# Altium PCB PCB1_backup.PcbDoc
Units mil, origin at the board's own origin, x right, y up, seen from the top; angles counter-clockwise.
Board outline 2660 x 2700 mil, 2 copper layers (Top Layer, Bottom Layer); 54 components, 42 nets, 229 pads, 33 vias.
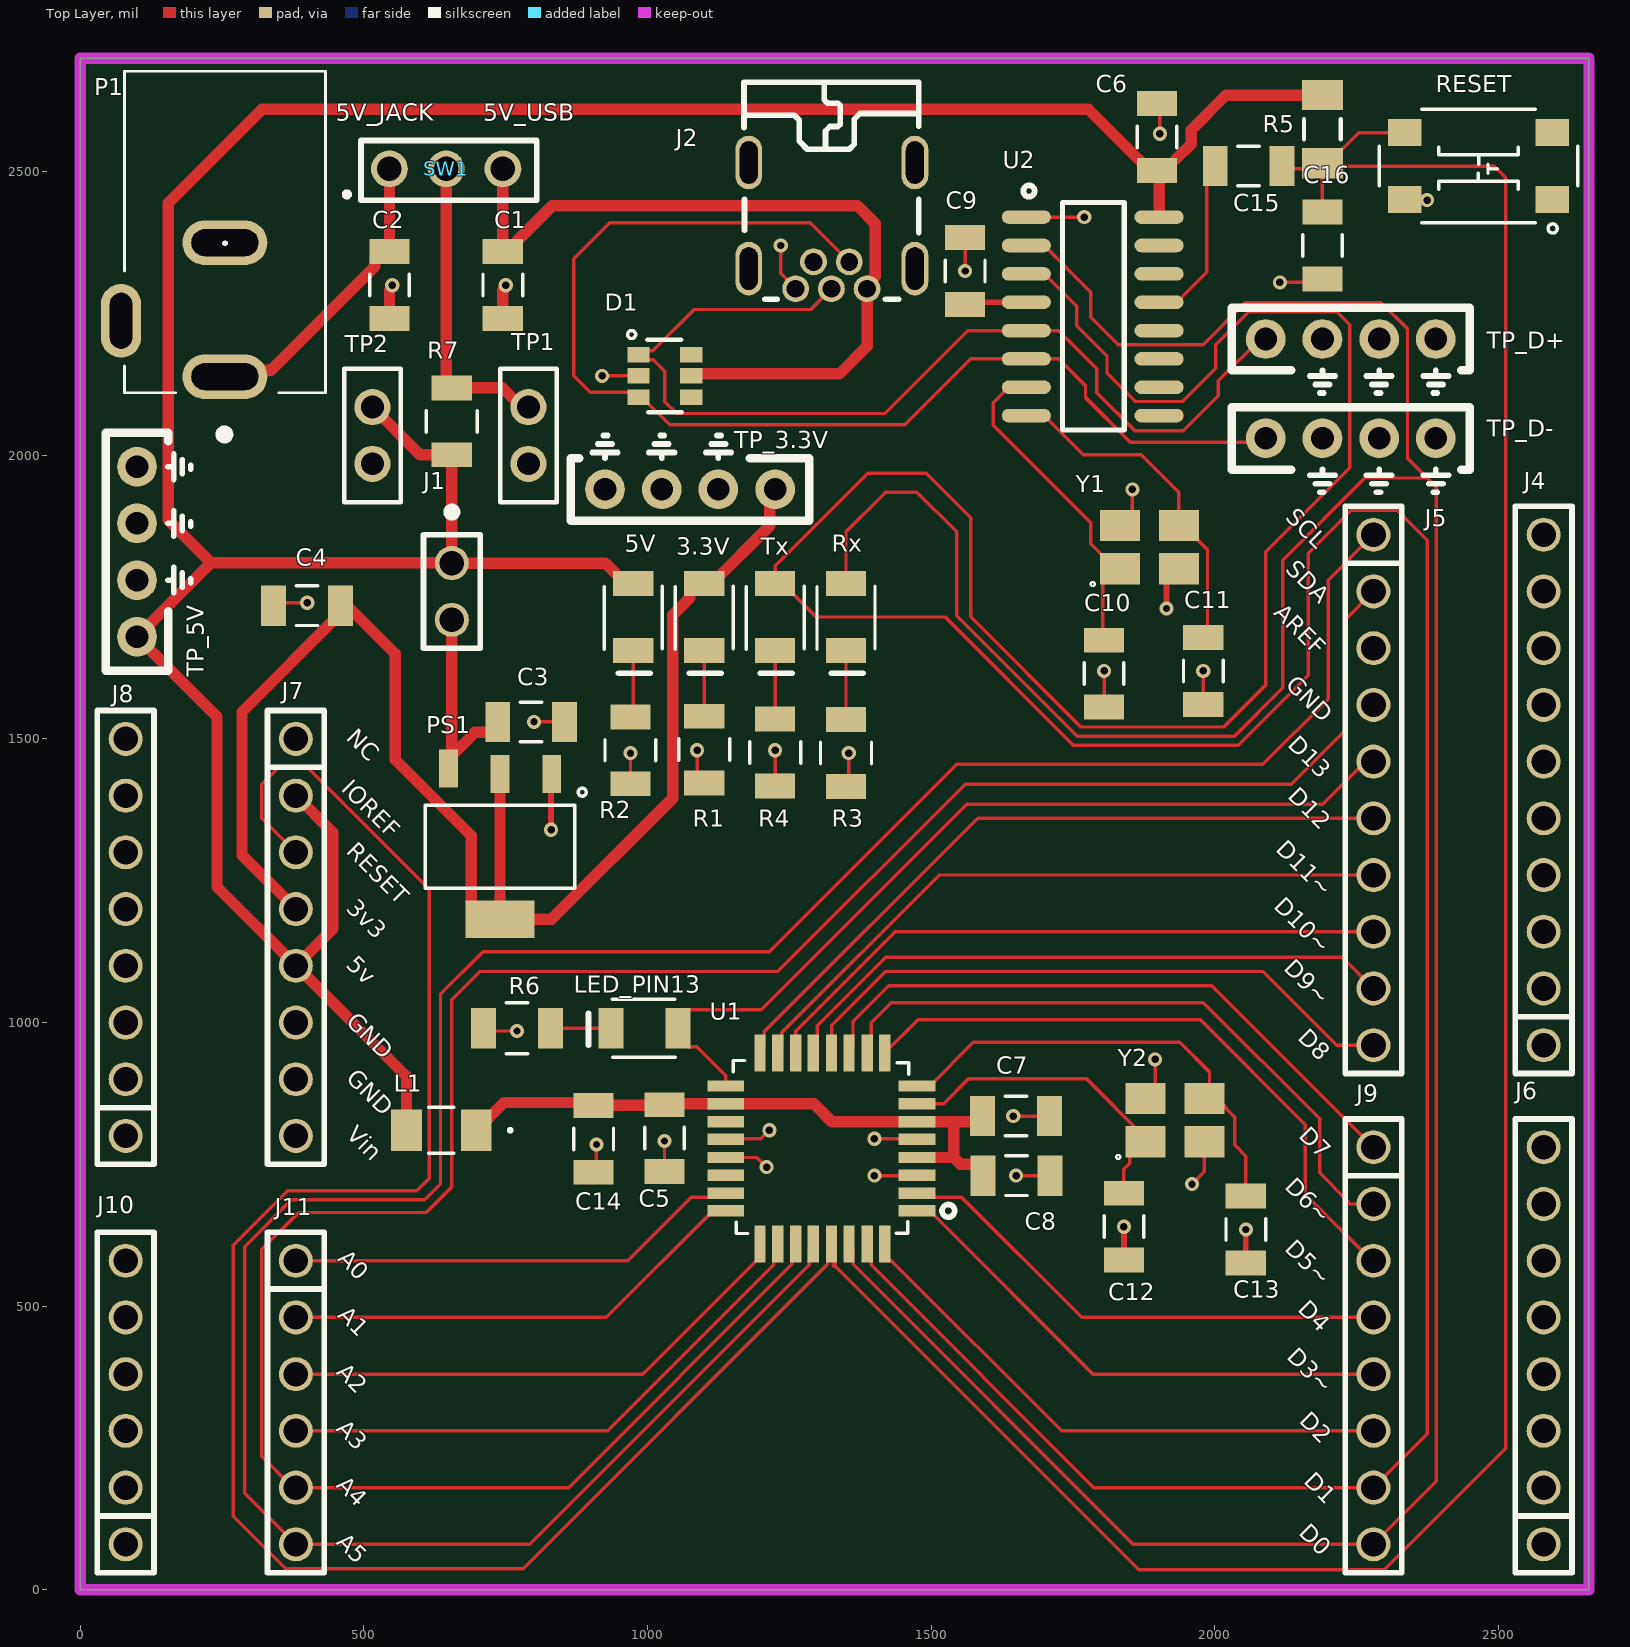
[diagram p0: Top Layer view]
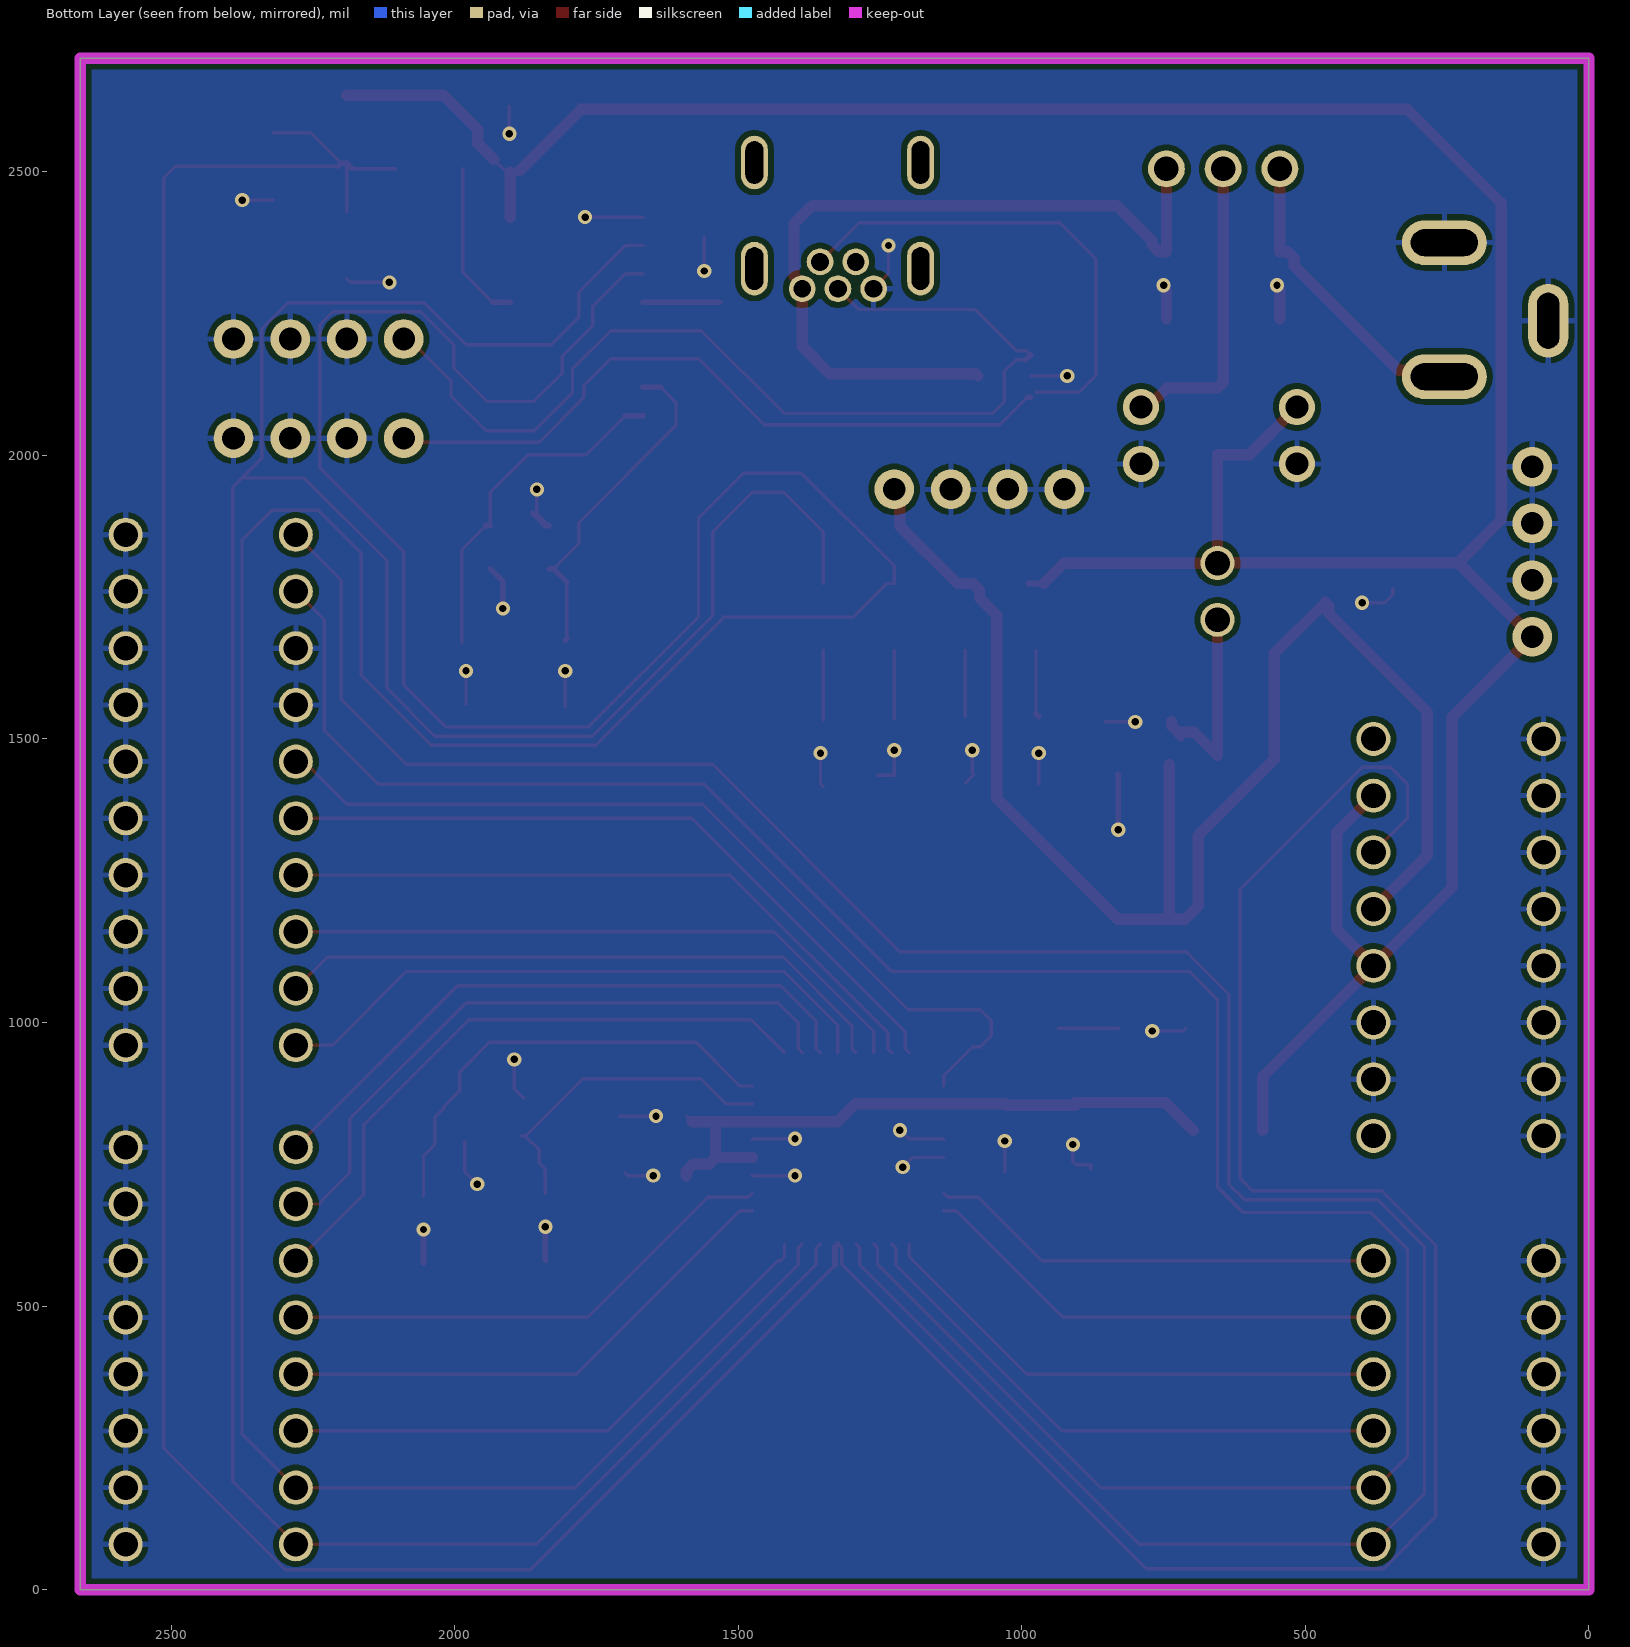
[diagram p1: Bottom Layer view, seen from below]
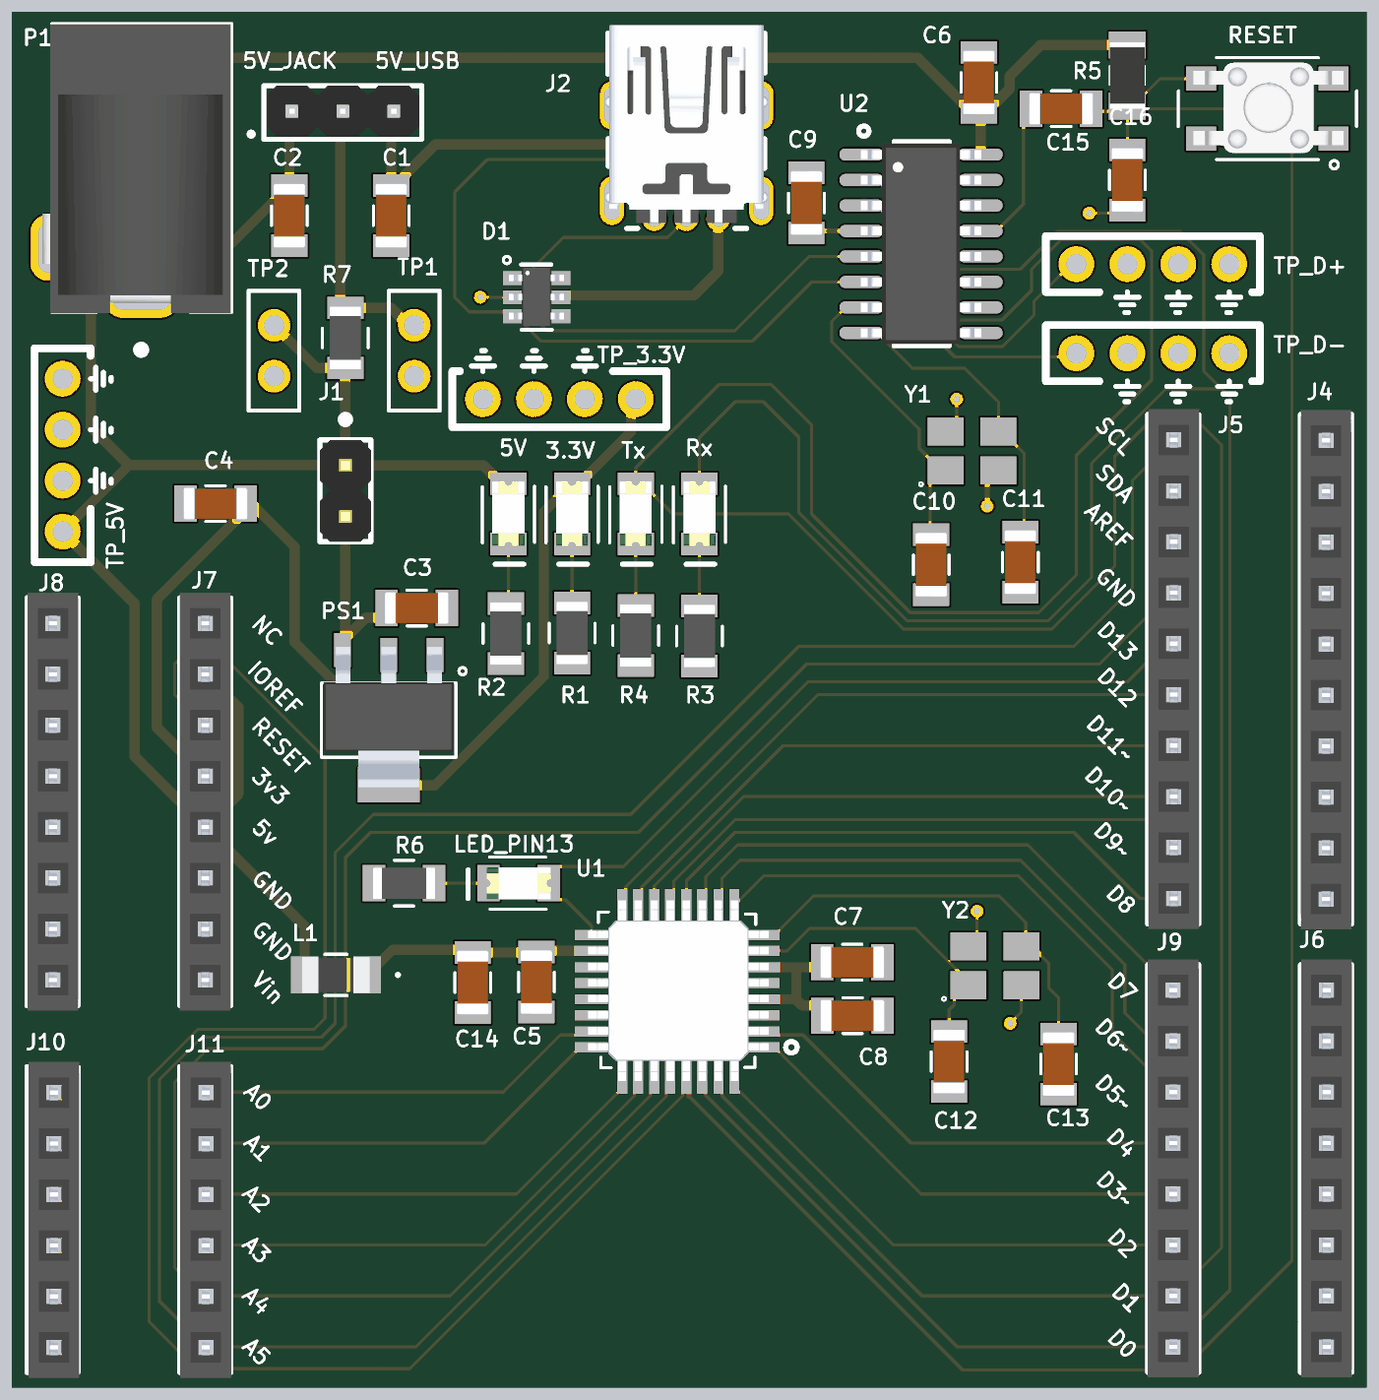
[diagram p2: 3D render of the assembled board from above, using the file's embedded part models]

## Layer stack, top to bottom
Top Solder: solder mask 0.4, Solder Resist, Dk 3.5
Top Layer: signal copper 1.4
Dielectric 1: dielectric 12.6, FR-4, Dk 4.8
Bottom Layer: signal copper 1.4
Bottom Solder: solder mask 0.4, Solder Resist, Dk 3.5

## Board outline
2660,0 2660,2700 0,2700 0,0

## Design rules (kind name [scope] priority, off if disabled: settings)
Clearance [All] p1: gap=10 ignorepadtopadclearanceinfootprint=FALSE
PlaneClearance [All] p1: clearance=10
PlaneConnect [All] p1: planeconnectstyle=Direct reliefexpansion=20 reliefentries=4 reliefconductorwidth=10 reliefairgap=10
PolygonConnect [All] p1: thpad.connectstyle=Relief thpad.reliefconductorwidth=10 thpad.reliefentries=4 thpad.polygonreliefangle="90 Angle" thpad.airgapwidth=10 smdpad.connectstyle=Direct smdpad.reliefconductorwidth=10 smdpad.reliefentries=4 smdpad.polygonreliefangle="90 Angle" smdpad.airgapwidth=10 via.connectstyle=Direct via.reliefconductorwidth=10 via.reliefentries=4 via.polygonreliefangle="90 Angle" via.airgapwidth=10
RoutingVias [All] p1: holewidth=13 width=25 viastyle="Through Hole" minholewidth=13 minwidth=25 maxholewidth=60 maxwidth=80
SolderMaskExpansion [All] p1: expansion=4 istentingtop=FALSE
Width "Schematic Width Constraint_4" [InNet('+5')] p1: maxlimit=30 minlimit=20 preferedwidth=20 minimp=50.000000 maximp=50.000000 favimp=50.000000
Width "Schematic Width Constraint_3" [InNet('5V_USB')] p2: maxlimit=30 minlimit=20 preferedwidth=20 minimp=50.000000 maximp=50.000000 favimp=50.000000
Width "Schematic Width Constraint_2" [InNet('3.3V')] p3: maxlimit=30 minlimit=20 preferedwidth=20 minimp=50.000000 maximp=50.000000 favimp=50.000000
Width "Schematic Width Constraint_1" [InNet('5V_JACK')] p4: maxlimit=30 minlimit=20 preferedwidth=20 minimp=50.000000 maximp=50.000000 favimp=50.000000
Width "Schematic Width Constraint" [InNet('NetR7_2')] p5: maxlimit=30 minlimit=20 preferedwidth=20 minimp=50.000000 maximp=50.000000 favimp=50.000000
Width [All] p6: maxlimit=10 minlimit=6 preferedwidth=6 minimp=50.000000 maximp=50.000000 favimp=50.000000
28 further rules are at their usual default settings.

## Classes and differential pairs
component class Sheet2: J4 J5 J6 J7 J8 J9 J10 J11
component class Sheet1: 3.3V 5V C1 C2 C3 C4 C5 C6 C7 C8 C9 C10 C11 C12 C13 C14 C15 C16 D1 J1 J2 L1 LED_PIN13 P1 PS1 R1 R2 R3 R4 R5 R6 R7 RESET Rx SW1 TP1 TP2 TP_3.3V TP_5V TP_D+ TP_D- Tx U1 U2 Y1 Y2

## Components (designator, comment, footprint, x,y, rotation, side; value= is the part's Value field where it differs from the comment)
3.3V "LED_RED_1206" LED_1206 1100,1715 r270 top value=Red (schematic designator LED1)
5V "LED_RED_1206" LED_1206 975,1715 r270 top value=Red (schematic designator LED2)
C1 "C_22uF_1206" 1206_Passive_Capacitor 745,2300 r90 top value=22µF
C2 "C_22uF_1206" 1206_Passive_Capacitor 545,2300 r90 top value=22µF
C3 "C_22uF_1206" 1206_Passive_Capacitor 795,1530 r0 top value=22µF
C4 "C_22uF_1206" 1206_Passive_Capacitor 400,1735 r180 top value=22µF
C5 "C_22uF_1206" 1206_Passive_Capacitor 1030,796 r90 top value=22µF
C6 "C_22uF_1206" 1206_Passive_Capacitor 1898.5,2561.5 r90 top value=22µF
C7 "C_22uF_1206" 1206_Passive_Capacitor 1650,835 r180 top value=22µF
C8 "C_22uF_1206" 1206_Passive_Capacitor 1650.5,730 r180 top value=22µF
C9 "C_22uF_1206" 1206_Passive_Capacitor 1560,2325 r90 top value=22µF
C10 "C_22uF_1206" 1206_Passive_Capacitor 1805,1615 r90 top value=22pF
C11 "C_22uF_1206" 1206_Passive_Capacitor 1980,1620 r90 top value=22pF
C12 "C_22uF_1206" 1206_Passive_Capacitor 1840,640 r90 top value=22pF
C13 "C_22uF_1206" 1206_Passive_Capacitor 2055,635 r90 top value=22pF
C14 "C_22uF_1206" 1206_Passive_Capacitor 905,795 r90 top value=22µF
C15 "1uF" 1206_Passive_Capacitor 2060,2510 r0 top
C16 "C_1uF_1206" 1206_Passive_Capacitor 2190,2370 r90 top value=1µF
D1 "D_TVS_Diode" TVS 1030,2140 r0 top value="TVS DIODE 5.5V 6TSOP"
J1 "JM_2_PIN_MALE" 2_PIN_100MIL 655,1760 r270 top value="2 PIN"
J2 "J_USB_B_Mini" USB_MINI_B 1325,2405 r180 top value="USB mini B"
J4 "JF_10_PIN_FEMALE_" "10_PIN_100MIL - Female" 2580,960 r90 top value=Female
J5 "JF_10_PIN_FEMA_ARDUINO" 10_PIN_ARDUINO_100MIL 2280,1860 r270 top value=Female
J6 "JF_8_PIN_FEMALE" "8_PIN_100MIL - Female" 2580,80 r90 top value=Female
J7 "JF_8_PIN_FEMA_ARD-Pwr" 8_PIN_ARD-PWR_100MIL 380,1500 r270 top value=Female
J8 "JF_8_PIN_FEMALE" "8_PIN_100MIL - Female" 80,800 r90 top value=Female
J9 "JF_8_PIN_FEMA_ARD-Dig" 8_PIN_ARD-DIG_100MIL 2280,780 r270 top value=Female
J10 "JF_6_PIN_FEMALE" "6_PIN_100MIL -Female" 80,80 r90 top value=Female
J11 "JF_6_PIN_FEMA_ARD-Anolog" 6_PIN_ARD-Analog_100mil 380,580 r270 top value=Female
L1 "FB_10uH_1206" AIML-1206_ABR-M 636.5,810 r180 top
LED_PIN13 "LED_RED_1206" LED_1206 995,990 r180 top value=Red (schematic designator LED5)
P1 "P_Power Jack" Power_Jack 255,2138.78 r90 top value="CONN PWR JACK 2X5.5MM SOLDER"
PS1 "PS_AMS_LDO_3v3" LDO 740,1310 r180 top value="IC REG LINEAR 3.3V 800MA SOT223"
R1 "R_1K_1206" 1206_Passive_Resitor 1100,1481 r90 top value=1k
R2 "R_1K_1206" 1206_Passive_Resitor 970,1480 r90 top value=1k
R3 "R_1K_1206" 1206_Passive_Resitor 1350,1475 r90 top value=1k
R4 "R_1K_1206" 1206_Passive_Resitor 1225,1476 r90 top value=1k
R5 "Resistor 10k +/-1% 1206 250 mW" RESC3216X60X45ML15T20 2190,2575 r90 top value=10k
R6 "R_1K_1206" 1206_Passive_Resitor 770,990 r0 top value=1k
R7 "R_500mOhm_1206" 1206_Passive_Resitor 655,2060 r90 top value=0.5
RESET "SW_Push_Button_JLC" Switch_JLC 2465,2510 r180 top (schematic designator SW2)
Rx "LED_RED_1206" LED_1206 1350,1715 r270 top value=Red (schematic designator LED3)
SW1 "SW_3Pin_100mil_Switch" 3_PIN_100mil 545,2505 r0 top value="CONN HEADER VERT 3POS 2.54MM"
TP1 "TP_Curr+" TP_Diff_Probe 790,1985 r90 top
TP2 "TP_Curr-" TP_Diff_Probe 515,2085 r270 top
TP_3.3V "TP_10x_Probe" TP10x_Probe 1075,1940 r180 top
TP_5V "TP_10x_Probe" TP10x_Probe 100,1830 r90 top
TP_D+ "TP_D+" TP10x_Probe 2240,2205 r0 top (schematic designator TP4)
TP_D- "TP_D-" TP10x_Probe 2240,2030 r0 top (schematic designator TP6)
Tx "LED_RED_1206" LED_1206 1225,1715 r270 top value=Red (schematic designator LED4)
U1 "U_ATMega328P" ATMega328P 1306.5,778 r0 top value="IC MCU 8BIT 32KB FLASH 32TQFP"
U2 "U_USBtoSerial" "USB to serial" 1785,2245 r270 top value="USB to Serial"
Y1 "X_12MHz_Res" "Crystal resonator" 1885,1840 r0 top value=12MHz
Y2 "X322516MLB4SI" "Crystal resonator" 1930,830 r0 top value=16MHz

## Footprints (in the part's own frame and the unit in brackets; to place one, negate y for a bottom-side part, rotate by r counter-clockwise, add the part's x,y. Pads: shape width x height; smd on the part's side, far side on the other; paste and mask are expansions set on the pad)
2_PIN_100MIL [mil]
  round 60 hole 43.31: 1(-50,0) 2(50,0)
  silkscreen extent -145,-50 100,50, body extent -100,-50 100,50, height 336
3_PIN_100mil [mm]
  round 1.65 hole 1.1: 1(0,0) 2(2.54,0) 3(5.08,0)
  silkscreen extent -2,-1.4 6.6,1.27, body extent -1.14,-1.27 6.48,1.27, height 8.38
"6_PIN_100MIL -Female" [mil]
  round 60 hole 43.31: 1(0,0) 2(100,0) 3(200,0) 4(300,0) 5(400,0) 6(500,0)
  silkscreen extent -50,-50 550,50, body extent -61,-53 559,47, height 335
6_PIN_ARD-Analog_100mil [mil]
  round 60 hole 43.31: 1(0,0) 2(100,0) 3(200,0) 4(300,0) 5(400,0) 6(500,0)
  silkscreen extent -50,-50 550,50, body extent -59,-49 561,51, height 335
"8_PIN_100MIL - Female" [mil]
  round 60 hole 43.31: 1(0,0) 2(100,0) 3(200,0) 4(300,0) 5(400,0) 6(500,0) 7(600,0) 8(700,0)
  silkscreen extent -50,-50 750,50, body extent -60,-51 760,49, height 335
8_PIN_ARD-DIG_100MIL [mil]
  round 60 hole 43.31: 1(0,0) 2(100,0) 3(200,0) 4(300,0) 5(400,0) 6(500,0) 7(600,0) 8(700,0)
  silkscreen extent -50,-50 750,50, body extent -60,-50 760,50, height 335
8_PIN_ARD-PWR_100MIL [mil]
  round 60 hole 43.31: 1(0,0) 2(100,0) 3(200,0) 4(300,0) 5(400,0) 6(500,0) 7(600,0) 8(700,0)
  silkscreen extent -50,-50 750,50, body extent -60,-50 760,50, height 335
"10_PIN_100MIL - Female" [mil]
  round 60 hole 43.31: 1(0,0) 2(100,0) 3(200,0) 4(300,0) 5(400,0) 6(500,0) 7(600,0) 8(700,0) 9(800,0) 10(900,0)
  silkscreen extent -50,-50 950,50, body extent -61,-50 959,50, height 335
10_PIN_ARDUINO_100MIL [mil]
  round 60 hole 43.31: 1(0,0) 2(100,0) 3(200,0) 4(300,0) 5(400,0) 6(500,0) 7(600,0) 8(700,0) 9(800,0) 10(900,0)
  silkscreen extent -50,-50 950,50, body extent -60,-49 960,51, height 335
1206_Passive_Capacitor [mil]
  rect 44x71 smd: 1(-59,0) 2(59,0)
  silkscreen extent -19,-35 19,35, body extent -63,-31 63,32, height 50
1206_Passive_Resitor [mil]
  rect 44x71 smd: 1(-59,0) 2(59,0)
  silkscreen extent -19,-45 19,45, body extent -61,-31 61,31, height 26
AIML-1206_ABR-M [mil]
  rect 54x73 smd paste+0 mask+0: 1(-61.5,0) 2(61.5,0)
  silkscreen extent -124,-40 22,40, body extent -66,-36 66,36, height 55
ATMega328P [mm]
  rect 1.65x0.508 smd mask+0.025: 1(4.28,-2.794) 2(4.28,-2.007) 3(4.28,-1.194) 4(4.28,-0.406) 5(4.28,0.406) 6(4.28,1.194) 7(4.28,2.007) 8(4.28,2.794) 17(-4.28,2.794) 18(-4.28,2.007) 19(-4.28,1.194) 20(-4.28,0.406) 21(-4.28,-0.406) 22(-4.28,-1.194) 23(-4.28,-2.007) 24(-4.28,-2.794)
  rect 0.508x1.65 smd mask+0.025: 9(2.843,4.28) 10(2.056,4.28) 11(1.243,4.28) 12(0.455,4.28) 13(-0.357,4.28) 14(-1.145,4.28) 15(-1.958,4.28) 16(-2.745,4.28) 25(-2.745,-4.28) 26(-1.958,-4.28) 27(-1.145,-4.28) 28(-0.357,-4.28) 29(0.455,-4.28) 30(1.243,-4.28) 31(2.056,-4.28) 32(2.843,-4.28)
  silkscreen extent -3.94,-3.81 5.97,3.94, body extent -4.45,-4.47 4.55,4.53, height 1.16
"Crystal resonator" [mm]
  rect 1.8x1.4 smd: 1(-1.32,-1.02) 2(1.32,-1.02) 3(1.32,0.92) 4(-1.32,0.92)
  silkscreen extent -2.63,-1.79 -2.45,-1.61, body extent -1.65,-1.2 1.65,1.2, height 0.8
LDO [mm]
  rect 0.838x1.7 smd: 1(-2.311,-3.25) 2(0,-3.25) 3(2.311,-3.5)
  rect 3.099x1.7 smd: 4(0,3.25)
  silkscreen extent -3.86,-2.62 3.35,1.85, body extent -3.25,-3.65 3.25,3.35, height 1.85
LED_1206 [mil]
  rect 44x71 smd: 1(-59,0) 2(59,0)
  silkscreen extent -54,-51 99,51, body extent -63,-31 63,31, height 28
Power_Jack [mm]
  oval 2x3.8 hole 1.2 slot 3 at 90 deg: 1(0,0) 2(6,0)
  oval 3.3x1.8 hole 1 slot 2.5 at 0 deg: 3(2.5,4.65)
  silkscreen extent -2.79,-4.5 13.68,4.5, body extent -0.76,-4.45 13.64,4.95, height 11.49
RESC3216X60X45ML15T20 [mm] "Chip Resistor, 2-Leads, Body 3.3x1.75mm, IPC Low Density"
  rect 1.35x1.85 smd: 1(-1.525,0) 2(1.525,0)
  silkscreen extent -0.45,-0.82 0.45,0.82, body extent -1.65,-0.87 1.65,0.87, height 0.6
Switch_JLC [mm]
  rect 1.5x1.2 smd: 1(-3.3,1.5) 2(3.3,1.5) 3(-3.3,-1.5) 4(3.3,-1.5)
  silkscreen extent -4.44,-2.54 4.45,3, body extent -3.8,-2.29 3.7,2.21, height 3.7
TP10x_Probe [mil] "Small Probs footprint"
  round 70 hole 40: 1(-150,0) 2(-50,0) 2(50,0) 2(150,0)
  silkscreen extent -210,-95 210,55
TP_Diff_Probe [mm]
  round 1.62 hole 1.02: 1(0,0) 2(2.54,0)
  silkscreen extent -1.72,-1.27 4.26,1.26
TVS [mm]
  rect 1x0.7 smd mask+0.025: 1(-1.162,0.95) 2(-1.162,0) 3(-1.162,-0.95) 4(1.2,-0.95) 5(1.2,0) 6(1.2,0.95)
  silkscreen extent -1.65,-1.63 0.76,2.03, body extent -1.37,-1.44 1.38,1.46, height 1.1
"USB to serial" [mil]
  oval 24x86.61 smd: 1(-175,-117) 2(-125,-117) 3(-75,-117) 4(-25,-117) 5(25,-117) 6(75,-117) 7(125,-117) 8(175,-117) 9(175,117) 10(125,117) 11(75,117) 12(25,117) 13(-25,117) 14(-75,117) 15(-125,117) 16(-175,117)
  silkscreen extent -231,-122 201,56, body extent -197,-118 197,118, height 71
USB_MINI_B [mm]
  round 1.2 hole 0.8: 1(-1.58,2.826) 2(-0.78,1.622) 3(0.02,2.826) 4(0.82,1.622) 5(1.62,2.826)
  oval 1.2x2.4 hole 0.8 slot 1.9 at 90 deg: 6(-3.72,1.924) 7(3.72,1.924) 8(-3.72,-2.826) 9(3.72,-2.826)
  silkscreen extent -3.89,-6.42 3.93,3.3, body extent -4.04,-6.83 4.06,3.02, height 3.98

## Part data
3.3V 5V LED_PIN13 Rx Tx: library part CMP-007-00045-1, "Red 621~631nm 1206 Light Emitting Diodes (LED) RoHS", LCSC Part#=C93133, MFR Part #=15-21/R6C-FQ1R1B/2T, Component Type=Standard, Datasheet=https://datasheet.lcsc.com/szlcsc/1811151241_Everlight-Elec-15-21-R6C-FQ1R1B-2T_C93133.pdf, Design Item ID=LED_RED_1206, Pins=2, Source=ECEN5730Lib_2023_05_DS.SchLib, Type=Extended
C1 C2 C3 C4 C6 C9 C10 C11 C12 C13: library part CMP-001-00089-1, "22uF ±10% 25V X5R 1206 Multilayer Ceramic Capacitors MLCC - SMD/SMT RoHS", LCSC Part#=C12891, MFR Part #=CL31A226KAHNNNE, Component Type=Standard, Datasheet=https://datasheet.lcsc.com/lcsc/1811031514_Samsung-Electro-Mechanics-CL31A226KAHNNNE_C12891.pdf, Design Item ID=C_22uF_1206, Pins=2, Source=ECEN5730Lib_2023_05_DS.SchLib, Type=basic
C5 C7 C8 C14: library part CMP-001-00098-1, "22uF ±10% 25V X5R 1206 Multilayer Ceramic Capacitors MLCC - SMD/SMT RoHS", LCSC Part#=C12891, MFR Part #=CL31A226KAHNNNE, Component Type=Standard, Datasheet=https://datasheet.lcsc.com/lcsc/1811031514_Samsung-Electro-Mechanics-CL31A226KAHNNNE_C12891.pdf, Design Item ID=C_22uF_1206, Pins=2, Source=ECEN5730Lib_2023_05_DS.SchLib, Type=basic
C15: library part C_1uF_1206, "MULTILAYER CERAMIC CAPACITORS MLCC - SMD/SMT 1UF 50V 1206 ROHS", LCSC Part#=C1848, MFR Part #=CL31B105KBHNNNE, Digikey Link=https://www.digikey.com/product-detail/en/C1206C105M4RACTU/399-8150-1-ND/3471873/?itemSeq=304982366, Type=Basic
C16: library part CMP-001-00095-1, "MULTILAYER CERAMIC CAPACITORS MLCC - SMD/SMT 1UF 50V 1206 ROHS", LCSC Part#=C1848, MFR Part #=CL31B105KBHNNNE, Component Type=Standard, Design Item ID=C_1uF_1206, Digikey Link=https://www.digikey.com/product-detail/en/C1206C105M4RACTU/399-8150-1-ND/3471873/?itemSeq=304982366, Pins=2, Source=ECEN5730Lib_2023_05_DS.SchLib, Type=Basic
D1: library part CMP-004-00031-1, "TVS SOT-23-6 ROHS", LCSC Part#=C85364, MFR Part #=SRV05-4-P-T7, Component Type=Standard, Datasheet=https://datasheet.lcsc.com/szlcsc/ProTek-Devices-SRV05-4-P-T7_C85364.pdf, Design Item ID=D_TVS_Diode, Pins=6, Source=ECEN5730Lib_2023_05_DS.SchLib, Type=Basic
J1: library part CMP-002-00089-1, "2.54mm Straight 2 1 Header,Breakaway Through Hole,P=2.54mm Pin Header & Female Header ROHS", LCSC Part#=C124375, MFR Part #=B-2100S02P-A110, Component Type=Standard, Datasheet=https://datasheet.lcsc.com/lcsc/1811151421_Ckmtw-Shenzhen-Cankemeng-B-2100S02P-A110_C124375.pdf, Design Item ID=JM_2_PIN_MALE, Pins=2, Source=ECEN5730Lib_2023_05_DS.SchLib, Type=Extended
J2: library part CMP-013-000002-1, "Through Hole USB Connectors RoHS", LCSC Part#=C46398, MFR Part #=920-462A2021D10102, Component Type=Standard, Datasheet=https://datasheet.lcsc.com/szlcsc/2103081233_Jing-Extension-of-the-Electronic-Co-920-462A2021D10102_C46398.pdf, Design Item ID=J_USB_B_Mini, Pin Count=9, Source=ECEN5730Lib_2023_05_DS.SchLib, Type=Extended
J4: library part CMP-002-00103-1, "10 Position Header Connector 0.100\" (2.54mm) Through Hole Tin", LCSC Part#=C225507, MFR Part #=PPTC101LFBN-RC, Component Type=Standard, Design Item ID=JF_10_PIN_FEMALE_, Digikey Link=https://www.digikey.com/product-detail/en/PPTC101LFBN-RC/S7008-ND/810149/?itemSeq=304982352, Pins=10, Source=ECEN5730Lib_2023_05_DS.SchLib, Type=Extended
J5: library part CMP-002-00102-1, "10 Position Header Connector 0.100\" (2.54mm) Through Hole Tin", LCSC Part#=C225507, MFR Part #=PPTC101LFBN-RC, Component Type=Standard, Design Item ID=JF_10_PIN_FEMA_ARDUINO, Digikey Link=https://www.digikey.com/product-detail/en/PPTC101LFBN-RC/S7008-ND/810149/?itemSeq=304982352, Pins=10, Source=ECEN5730Lib_2023_05_DS.SchLib, Type=Extended
J6 J8: library part CMP-002-00113-1, "8 Position Header Connector 0.100\" (2.54mm) Through Hole Tin", LCSC Part#=C27438, MFR Part #=PPTC081LFBN-RC, Component Type=Standard, Design Item ID=JF_8_PIN_FEMALE, Digikey Link=https://www.digikey.com/product-detail/en/PPTC081LFBN-RC/S7006-ND/810147/?itemSeq=304982354, Pins=8, Source=ECEN5730Lib_2023_05_DS.SchLib, Type=Extended
J7: library part CMP-002-00112-1, "8 Position Header Connector 0.100\" (2.54mm) Through Hole Tin", LCSC Part#=C27438, MFR Part #=PPTC081LFBN-RC, Component Type=Standard, Design Item ID=JF_8_PIN_FEMA_ARD-Pwr, Digikey Link=https://www.digikey.com/product-detail/en/PPTC081LFBN-RC/S7006-ND/810147/?itemSeq=304982354, Pins=8, Source=ECEN5730Lib_2023_05_DS.SchLib, Type=Extended
J9: library part CMP-002-00111-1, "8 Position Header Connector 0.100\" (2.54mm) Through Hole Tin", LCSC Part#=C27438, MFR Part #=PPTC081LFBN-RC, Component Type=Standard, Design Item ID=JF_8_PIN_FEMA_ARD-Dig, Digikey Link=https://www.digikey.com/product-detail/en/PPTC081LFBN-RC/S7006-ND/810147/?itemSeq=304982354, Pins=8, Source=ECEN5730Lib_2023_05_DS.SchLib, Type=Extended
J10: library part CMP-002-00109-1, "6 Position Header Connector 0.100\" (2.54mm) Through Hole Tin", LCSC Part#=C40877, MFR Part #=PPTC061LFBN-RC, Component Type=Standard, Design Item ID=JF_6_PIN_FEMALE, Digikey Link=https://www.digikey.com/product-detail/en/PPTC061LFBN-RC/S7004-ND/810145/?itemSeq=304982353, Pins=6, Source=ECEN5730Lib_2023_05_DS.SchLib, Type=Extended
J11: library part CMP-002-00108-1, "6 Position Header Connector 0.100\" (2.54mm) Through Hole Tin", LCSC Part#=C40877, MFR Part #=PPTC061LFBN-RC, Component Type=Standard, Design Item ID=JF_6_PIN_FEMA_ARD-Anolog, Digikey Link=https://www.digikey.com/product-detail/en/PPTC061LFBN-RC/S7004-ND/810145/?itemSeq=304982353, Pins=6, Source=ECEN5730Lib_2023_05_DS.SchLib, Type=Extended
L1: library part CMP-006-00021-1, "25mA 10uH ±10% 800mO 1206  Inductors (SMD) ROHS", LCSC Part#=C1051, MFR Part #=CMI321609X100KT, Mfr_Name="FH (Guangdong Fenghua Advanced Tech)", Component Type=Standard, Datasheet=https://datasheet.lcsc.com/lcsc/1810311314_FH--Guangdong-Fenghua-Advanced-Tech-CMI321609X100KT_C1051.pdf, Design Item ID=FB_10uH_1206, Pins=2, Source=ECEN5730Lib_2023_05_DS.SchLib, Type=Basic
P1: library part CMP-002-00097-1, "Power Barrel Connector Jack 2.10mm ID (0.083\"), 5.50mm OD (0.217\") Through Hole, Right Angle", LCSC Part#=C136744, MFR Part #=PJ-102A, Component Type=Standard, Design Item ID="P_Power Jack", Digikey Link=https://www.digikey.com/product-detail/en/PJ-102A/CP-102A-ND/275425/?itemSeq=304982367, Pins=3, Source=ECEN5730Lib_2023_05_DS.SchLib, Type=Extended
PS1: library part CMP-017-000002-1, "LOW DROPOUT REGULATORS(LDO) POSITIVE FIXED 1.3V @ 800MA 15V 3.3V 1A SOT-223 ROHS", LCSC Part#=C6186, MFR Part #=AMS1117-3.3, Component Type=Standard, Design Item ID=PS_AMS_LDO_3v3, Pin Count=4, Source=ECEN5730Lib_2023_05_DS.SchLib, Type=Basic
R1 R2 R3 R4 R6: library part CMP-009-00194-1, "CHIP RESISTOR - SURFACE MOUNT 1KOHMS ±1% 1/4W 1206 ROHS", LCSC Part#=C4410, MFR Part #=RNCP1206FTD1K00CT, Component Type=Standard, Design Item ID=R_1K_1206, Digikey Link=https://www.digikey.com/product-detail/en/RNCP1206FTD1K00/RNCP1206FTD1K00CT-ND/2240675/?itemSeq=304982373, Pins=2, Source=ECEN5730Lib_2023_05_DS.SchLib, Type=Basic
R5: library part CMP-009-00016-5, "Chip Resistor, 10 KOhm, +/- 1%, 0.25 W, -55 to 155 degC, 1206 (3216 Metric)", Case/Package=1206, Max Operating Temperature=155°C, Min Operating Temperature=-55°C, Power=250mW, Tolerance=1%, Voltage Rating=200V, Mounting Technology=SM, Pins=2, RoHS Compliant=True
R7: library part CMP-009-00210-1, "Resistors/Shunt 250mW 500mO ±800ppm/? ±5% 1206  Current Sense  Resistors ROHS", LCSC Part#=C247433, MFR Part #=1206W4J050KT5E, Component Type=Standard, Datasheet=https://datasheet.lcsc.com/lcsc/1810301438_UNI-ROYAL-Uniroyal-Elec-1206W4J050KT5E_C247433.pdf, Design Item ID=R_500mOhm_1206, Pins=2, Source=ECEN5730Lib_2023_05_DS.SchLib, Type=Extended
RESET: library part CMP-011-00014-1, "Tactile Switch SPST-NO Top Actuated Surface Mount", LCSC Part#=C2837550, MFR Part #=KH-4.5X4.5X4.3H-STM, Component Type=Standard, Datasheet=https://datasheet.lcsc.com/lcsc/2106081532_Shenzhen-Kinghelm-Elec-KH-4.5X4.5X4.3H-STM_C2837550.pdf, Design Item ID=SW_Push_Button_JLC, Pins=4, Source=ECEN5730Lib_2023_05_DS.SchLib, Type=Extended
SW1: library part CMP-002-00126-1, "Connector Header Through Hole 3 position 0.100\" (2.54mm)", LCSC Part#=C49257, MFR Part #=PREC003SAAN-RC, Component Type=Standard, Design Item ID=SW_3Pin_100mil_Switch, Digikey Link=https://www.digikey.com/product-detail/en/PREC003SAAN-RC/S1012EC-03-ND/2774851/?itemSeq=304982371, Pins=3, Source=ECEN5730Lib_2023_05_DS.SchLib, Type=Extended
TP1 TP2: library part CMP-016-000002-1, "Test Point 300 mil centers", Component Type=Standard, Design Item ID=TP_Diff_Probe, Pin Count=2, Source=ECEN5730Lib_2023_05_DS.SchLib
TP_3.3V TP_5V: library part CMP-016-000001-1, "Test Point 300 mil centers", Component Type=Standard, Design Item ID=TP_10x_Probe, Pin Count=2, Source=ECEN5730Lib_2023_05_DS.SchLib
TP_D+ TP_D-: library part CMP-016-000004-1, "Test Point 300 mil centers", Component Type=Standard, Design Item ID=TP_10x_Probe, Pin Count=2, Source=ECEN5730Lib_2023_05_DS.SchLib
U1: library part CMP-031-00012-1, "AVR AVR® ATmega Microcontroller IC 8-Bit 20MHz 32KB (16K x 16) FLASH 32-TQFP (7x7)", LCSC Part#=C14877, MFR Part #=ATMEGA328P-AU, Component Type=Standard, Design Item ID=U_ATMega328P, Digikey Link=https://www.digikey.com/product-detail/en/ATMEGA328P-ANR/ATMEGA328P-ANRCT-ND/2774230/?itemSeq=304982365, Pins=32, Source=ECEN5730Lib_2023_05_DS.SchLib, Type=Basic
U2: library part CMP-031-00016-1, "Transceiver USB 2.0 2Mbps SOP-16_150mil USB ICs RoHS", LCSC Part#=C14267, MFR Part #=CH340G, Component Type=Standard, Datasheet=https://datasheet.lcsc.com/lcsc/2008191806_WCH-Jiangsu-Qin-Heng-CH340G_C14267.pdf, Design Item ID=U_USBtoSerial, Pins=16, Source=ECEN5730Lib_2023_05_DS.SchLib, Type=Basic
Y1: library part CMP-003-00030-1, "SMD Crystal Resonators 12MHz ±10ppm SMD-3225_4P RoHS", LCSC Part#=C9002, MFR Part #=X322512MSB4SI, Component Type=Standard, Datasheet=https://datasheet.lcsc.com/szlcsc/Yangxing-Tech-X322512MSB4SI_C9002.pdf, Design Item ID=X_12MHz_Res, Pins=4, Source=ECEN5730Lib_2023_05_DS.SchLib, Type=Basic
Y2: library part X_16Mhz_Res, "±10ppm 16000000Hz -40℃~85℃ 贴片无源晶振 60Ω 9pF SMD3225-4P Crystals ROHS", LCSC Part#=C13738, MFR Part #=X322516MLB4SI, Type=Basic

## Via types
v1: diameter 25, hole 13, Top Layer to Bottom Layer, 33 vias

## Nets (pads, with @x,y where several pads share a name; then routed paths per layer and width w, separated by ;. In a path a pad name is that pad's centre, name@x,y a point inside that pad or via, vN(x,y) a via of type N, cw(c..) or ccw(c..) an arc to the next point about the centre after c; other vN are vias at no path point)
3.3V: 3.3V.1 C4.1 J7.4 PS1.2 PS1.4 TP_3.3V.1 | length 2628.7
  Top Layer w20: J7.4 285,1295 285,1547.5 459,1721.5 C4.1 ; C4.1@464.75,1740.75 555,1650.5 555,1463.55 689,1329.55 689,1205.51 PS1.4@707.26,1187.26 ; PS1.4@712.46,1182.05 PS1.4 ; PS1.2@740,1454.92 PS1.2 PS1.4 ; TP_3.3V.1 1215.43,1930.43 1215.43,1875.93 1113.5,1774 3.3V.1 1086.5,1774 1074.5,1762 1074.5,1748.5 1044.5,1718.5 1044.5,1395.55 831,1182.05 PS1.4
5V_JACK: C2.2 P1.1 SW1.1 | length 535.1
  Top Layer w20: P1.1 266.24,2150.02 336.02,2150.02 519.5,2333.5 519.5,2347 531.5,2359 C2.2 SW1.1
5V_USB: C1.2 D1.5 J2.1 SW1.3 | length 1407.3
  Top Layer w20: SW1.3 C1.2 758.5,2359 770.5,2371 770.5,2378.28 832.22,2440 1370,2440 1401.72,2408.28 1401.72,2315.63 1387.2,2301.12 1387.2,2192.2 1338.62,2143.62 1080.87,2143.62 D1.5
328_RX: J9.8 Rx.1 U1.30 U2.2 | length 5920.8
  Top Layer w6: Rx.1 1350,1865 1420,1935 1475,1935 1545,1865 1545,1717.49 1757.49,1505 2035,1505 2120,1590 2120,1815 2265,1960 2375,1960 ; U1.30 1362.43,602.5 1362.43,573.63 1856.06,80 J9.8 2391,191 2391,1944 2375,1960 ; U2.2 1699.31,2370 1781.54,2287.76 1781.54,2243.46 1830,2195 1979.49,2195 2053.49,2269 2293.88,2269 2340,2222.88 2340,1995 2375,1960
328_TX: J9.7 Tx.1 U1.31 U2.3 | length 7163.4
  Top Layer w6: U1.31 1394.43,602.5 1394.43,572.63 1787.06,180 J9.7 2375,275 2375,1850 2322,1903 2240.51,1903 2165,1827.49 2165,1612.37 2041.63,1489 1750.86,1489 1524.86,1715 1297.5,1715 1238.5,1774 Tx.1 1225,1805 1388.66,1968.66 1491.34,1968.66 1570,1890 1570,1715.12 1764.12,1521 2015.88,1521 2090,1595.12 2090,1830 2238,1978 2238,2230 2215,2253 2060.12,2253 2001.89,2194.77 2001.89,2153.23 1943.66,2095 1860.34,2095 1810.25,2145.08 1810.25,2174.75 1756.5,2228.5 1756.5,2262.8 1699.31,2320 U2.3
+5: 5V.1 C6.1 J1.1 J7.2 J7.5 L1.2 R5.2 R7.1 TP2.1 TP_5V.1 U2.16 | length 5710.9
  Top Layer w6: C6.1@1885,2502.5 C6.1 ; C6.1@1902,2499 C6.1 ; C6.1@1931,2521.5 1912,2502.5 C6.1
  Top Layer w10: J1.1@654.5,1810.5 J1.1 ; 5V.1@961.5,1774 5V.1 5V.1@988.5,1774
  Top Layer w20: J7.2 445,1335 445,1165 J7.5 ; TP2.1 599,2001 R7.1 J1.1 925.5,1810 5V.1@961.5,1774 ; L1.2 575,905 J7.5 ; J1.1@654.5,1810.5 230.5,1810.5 ; C6.1@1885,2502.5 1844.75,2542.75 1777.5,2610 320,2610 155,2445 155,1886 230.5,1810.5 ; U2.16 C6.1@1902,2499 ; C6.1@1931,2521.5 1959,2549.5 1959,2574 2020.04,2635.04 R5.2 ; 230.5,1810.5 TP_5V.1 240.96,1539.04 240.96,1239.04 J7.5
A0: J11.1 U1.23 | length 807.3
  Top Layer w6: J11.1 965,580 1077,692 1130.99,692 U1.23
A1: J11.2 U1.24 | length 835.9
  Top Layer w6: J11.2 927.51,480 1115.51,668 U1.24
A2: J11.3 U1.25 | length 926.7
  Top Layer w6: J11.3 991.41,380 1198.43,587.02 U1.25
A3: J11.4 U1.26 | length 1003.4
  Top Layer w6: J11.4 929.79,280 1222.43,572.63 1222.43,602.5 U1.26
A4: J5.2 J11.5 U1.27 | length 4272
  Top Layer w6: U1.27 1254.43,602.5 1254.43,573.63 860.79,180 J11.5 375,180 320,235 320,600 385,665 610,665 655,710 655,1040 705,1090 1230,1090 1560,1420 2135,1420 2230,1515 2230,1710 J5.2
A5: J5.1 J11.6 U1.28 | length 4540.6
  Top Layer w6: U1.28 1285.43,602.5 1285.43,572.63 792.79,80 J11.6 290,170 290,605 372.37,687.37 607.37,687.37 635,715 635,1050 710,1125 1215,1125 1545,1455 2085,1455 2200,1570 2200,1780 J5.1
AVCC_5V: C5.2 C7.2 C8.2 C14.2 L1.1 U1.4 U1.6 U1.18 | length 1130.2
  Top Layer w6: C7.2@1581,825 C7.2
  Top Layer w10: C5.2 C5.2@1032,853 ; 1539.86,762 1540,761.86
  Top Layer w20: L1.1 747,859 C14.2@905,859 ; C14.2 C5.2@1029,854 ; C5.2@1030,857 U1.18 1293,857 1325,825 U1.6 1540,825 ; U1.4 1539.86,762 ; C7.2@1581,825 1540,825 ; C8.2 1591.5,738.14 1579.5,750.14 1551.72,750.14 1540,761.86 1540,825
D2: J9.6 U1.32 | length 1011.2
  Top Layer w6: U1.32 1418.43,587.02 1425.43,580.02 1429.98,580.02 1730,280 J9.6
D3: J9.5 U1.1 | length 924.3
  Top Layer w6: U1.1 1497.48,668 1785.48,380 J9.5
D4: J9.4 U1.2 | length 895.7
  Top Layer w6: U1.2 1482,692 1553.62,692 1765.62,480 J9.4
D5: J9.3 U1.9 | length 1133.7
  Top Layer w6: U1.9 1476.92,1005 1975,1005 2160,820 2160,697.37 2277.37,580 J9.3
D6: J9.2 U1.10 | length 1159.7
  Top Layer w6: U1.10 1394.43,953.5 1394.43,999.43 1430,1035 1980,1035 2185,830 2185,735 2235,685 2235,683.51 2238.51,680 J9.2
D7: J9.1 U1.11 | length 1120.4
  Top Layer w6: U1.11 1362.43,953.5 1362.43,1002.43 1425,1065 1995,1065 J9.1
D8: J5.10 U1.12 | length 1096.9
  Top Layer w6: U1.12 1324.84,946.92 1324.84,994.84 1420,1090 2085,1090 2215,960 J5.10
D9: J5.9 U1.13 | length 1104.1
  Top Layer w6: U1.13 1299.43,953.5 1299.43,994.43 1420,1115 2225,1115 J5.9
D10: J5.8 U1.14 | length 1129.4
  Top Layer w6: U1.14 1261.43,984.74 1436.68,1160 J5.8
D11: J5.7 U1.15 | length 1197.3
  Top Layer w6: U1.15 1236.43,953.5 1236.43,982.37 1514.06,1260 J5.7
D12: J5.6 U1.16 | length 1270.3
  Top Layer w6: U1.16 1205.43,953.5 1205.43,983.37 1582.06,1360 J5.6
D13: J5.5 LED_PIN13.1 U1.17 | length 1573.3
  Top Layer w6: U1.17 1137.99,906.01 1086.5,957.5 1073,957.5 1054,976.5 LED_PIN13.1 1054,1003.5 1073,1022.5 1200.25,1022.5 1562.75,1385 2190.39,1385 2265.39,1460 J5.5
D+: D1.1 J2.3 TP_D+.1 U2.5 | length 1799.7
  Top Layer w6: D1.1 991.23,2184.4 1009.4,2184.4 1082.12,2257.12 1287.59,2257.12 J2.3 ; D1.1@992.85,2168.78 1010.13,2168.78 1030.74,2148.17 1030.74,2094.43 1051.35,2073.82 1418.82,2073.82 1565,2220 U2.5 1725,2220 1792.25,2152.75 1792.25,2110.25 1859.51,2043 1944.49,2043 2006.51,2105.01 2006.51,2131.51 TP_D+.1@2080,2205
  Top Layer w10: D1.1 D1.1@992.85,2168.78
D-: D1.3 J2.2 TP_D-.1 U2.6 | length 2114.6
  Top Layer w6: D1.3@975.61,2111.22 898.78,2111.22 870,2140 870,2346.49 933.51,2410 1286.85,2410 J2.2 ; D1.3@990.14,2102.6 1038.92,2053.82 1453.82,2053.82 1570,2170 U2.6 1725,2170 1772.25,2122.75 1772.25,2101.97 1851.22,2023 TP_D-.1@2083,2023
  Top Layer w10: D1.3 D1.3@990.14,2102.6 ; TP_D-.1@2083,2023 TP_D-.1
GND: C1.1 C2.1 C3.2 C4.2 C5.1 C6.2 C7.1 C8.1 C9.2 C10.1 C11.1 C12.1 C13.1 C14.1 C16.1 D1.2 J2.5 J4.1 J4.2 J4.3 J4.4 J4.5 J4.6 J4.7 J4.8 J4.9 J4.10 J5.3 J5.4 J6.1 J6.2 J6.3 J6.4 J6.5 J6.6 J6.7 J6.8 J7.6 J7.7 J8.1 J8.2 J8.3 J8.4 J8.5 J8.6 J8.7 J8.8 J10.1 J10.2 J10.3 J10.4 J10.5 J10.6 P1.2 P1.3 PS1.1 R1.1 R2.1 R3.1 R4.1 R6.1 RESET.2 TP1.1 TP2.2 TP_3.3V.2 TP_5V.2 TP_D+.2 TP_D-.2 U1.3 U1.5 U1.20 U1.21 U2.1 Y1.2 Y1.4 Y2.2 Y2.4 | length 2299
  Top Layer w6: C4.2@346,1765 346,1754 360,1740 v1(400,1740) ; R6.1 716,985 v1(770,985) ; v1(800,1530) C3.2 ; C14.1@878.25,741.75 878.25,749.25 904.25,749.25 910,755 v1(910,785) ; v1(920,2140) D1.2 ; R2.1 v1(970,1475) ; C5.1 v1(1030,791) ; v1(1087.5,1480) 1087.5,1439.5 1085,1437 R1.1 ; U1.21 1193,762 v1(1210,745) ; U1.20 1138.99,795 1199.59,795 1214.59,810 v1(1215,810) ; v1(1225,1480) 1225,1436 R4.1@1255,1436 ; v1(1235,2370) 1235,2320.93 1261.22,2294.7 J2.5 ; R3.1 1355,1421 v1(1355,1475) ; v1(1400,730) 1474,730 U1.3 ; v1(1400,795) 1474,795 U1.5 ; v1(1560,2325) C9.2 ; v1(1645,835) C7.1 ; v1(1650,730) 1694.5,730 C8.1@1699.5,735 ; U2.1 v1(1770,2420) ; C10.1 v1(1805,1620) ; Y1.4 1855,1898.19 v1(1855,1940) ; Y2.4 1895,883.19 v1(1895,935) ; v1(1903.5,2567) C6.2@1903.5,2615.5 ; v1(1960,715) 1981.97,736.97 Y2.2 ; C11.1 v1(1980,1620) ; v1(2115,2305) 2184,2305 C16.1 ; RESET.2@2320.08,2450.94 2321.02,2450 v1(2374.5,2450)
  Top Layer w10: v1@545,2290.94 550,2295.94 v1(550,2300) ; v1@745,2290.94 750,2295.94 v1(750,2300) ; v1(830,1340) 830,1436.95 PS1.1 ; Y1.4 1840.91,1876.22 Y1.4@1862.08,1897.39 ; C12.1 v1(1840,640) ; v1(1915,1730) 1915,1777.87 Y1.2 ; C13.1 v1(2055,635)
  Top Layer w20: C2.1 v1@545,2290.94 ; C1.1 v1@745,2290.94
NetC3_1: C3.1 J1.2 PS1.3 | length 386.1
  Top Layer w10: C3.1@719,1499.5 736,1516.5 C3.1
  Top Layer w20: J1.2 655,1470.76 695.72,1511.48 724,1511.48 736,1523.48 C3.1
NetC9_1: C9.1 U2.4 | length 135
  Top Layer w10: C9.1@1533,2270 U2.4
NetC10_2: C10.2 U2.7 Y1.1 | length 596
  Top Layer w6: U2.7@1636.69,2120 1609.69,2093 1609.69,2052.7 1781.2,1881.2 1781.2,1843.8 Y1.1@1825.16,1799.84 ; C10.2@1802.6,1676.4 Y1.1@1802.6,1777.28
  Top Layer w10: U2.7@1636.69,2120 U2.7 ; C10.2@1802.6,1676.4 C10.2 ; Y1.1@1802.6,1777.28 1825.16,1799.84 Y1.1
NetC11_2: C11.2 U2.8 Y1.3 | length 614.5
  Top Layer w6: U2.8@1699.31,2070 1768.28,2001.02 1870.67,2001.02 1936.97,1934.72 Y1.3 ; Y1.3@1944.84,1876.22 1987.4,1833.66 C11.2@1987.4,1670.77
  Top Layer w10: U2.8 U2.8@1699.31,2070 ; Y1.3 Y1.3@1944.84,1876.22
NetC12_2: C12.2 U1.7 Y2.1 | length 583.6
  Top Layer w6: U1.7 1522,857 1566,901 1774,901 Y2.1@1875.16,799.84 ; C12.2 1840,741.34 1850.6,751.94 1850.6,775.28 Y2.1@1875.16,799.84 ; Y2.1@1883.03,799.84 Y2.1@1875.16,799.84
NetC13_2: C13.2 U1.8 Y2.3 | length 814.8
  Top Layer w6: U1.8 1497.48,888 1574.48,965 1938.69,965 1990.91,912.78 1990.91,880.16 2019.4,851.66 2019.4,848.79 2035.4,832.79 2035.4,784.13 2055,764.53 C13.2
NetLED1_2: 3.3V.2 R1.2 | length 116
  Top Layer w6: R1.2 3.3V.2
NetLED2_2: 5V.2 R2.2 | length 119.1
  Top Layer w6: R2.2@975,1544 5V.2
  Top Layer w10: R2.2 R2.2@975,1544
NetLED3_2: R3.2 Rx.2 | length 122
  Top Layer w6: R3.2 Rx.2
NetLED4_2: R4.2 Tx.2 | length 121
  Top Layer w6: R4.2 Tx.2
NetLED5_2: LED_PIN13.2 R6.2 | length 107
  Top Layer w6: R6.2 LED_PIN13.2
NetR7_2: R7.2 SW1.2 TP1.2 | length 539.2
  Top Layer w20: SW1.2 645,2129 R7.2 744.15,2119 778.15,2085 TP1.2
RESET_CH340: C15.1 U2.13 | length 288.1
  Top Layer w6: U2.13@1933.31,2270 1986,2322.69 C15.1@1986,2505
  Top Layer w10: U2.13 U2.13@1933.31,2270
RESET_PIN: C15.2 C16.2 J7.3 R5.1 RESET.4 U1.29 | length 7711.4
  Top Layer w6: J7.3@369.67,1289.67 J7.3 320,1360 320,1420 350,1450 400,1450 615,1235 615,725 593.37,703.37 365.74,703.37 270,607.63 270,129.19 362.19,37 780.79,37 1317.43,573.63 1317.43,602.5 U1.29 ; 1329.43,571.8 1866.23,35 2298.64,35 2513,249.36 2513,2489.31 2492.87,2509.44 R5.1@2205.36,2509.44 ; C15.2@2104,2505 R5.1@2180.04,2505 ; C16.2 R5.1 ; R5.1@2199.84,2514.96 2253.94,2569.05 RESET.4@2320.08,2569.05
  Top Layer w10: U1.29 1329.43,604.5 1329.43,571.8 ; R5.1@2180.04,2505 R5.1 2199.84,2514.96 R5.1@2205.36,2509.44
pads on no net: D1.4 D1.6 J2.4 J2.6 J2.7 J2.8 J2.9 J7.1 J7.8 RESET.1 RESET.3 U1.19 U1.22 U2.9 U2.10 U2.11 U2.12 U2.14 U2.15

## Polygon pours and split planes (outlines as drawn)
GND on Bottom Layer "GND_L02_P000" (solid, pour order 0): 0,0 0,2700 2660,2700 2660,0

## Keep-outs
Keep-Out Layer:
  the board outline again, w20

## Silkscreen, mask and mechanical layers (free items; w line width, h text height)
Top Overlay:
  text "5V_JACK" at 450,2590 h30
  text "5V_USB" at 710,2590 h30

## Text inside footprints (layer, text, board x,y; h text height)
J5: Top Overlay "SCL" at 2123.21,1889 h30 r315; Top Overlay "SDA" at 2123.21,1797 h30 r315; Top Overlay "AREF" at 2102,1721 h30 r315; Top Overlay "GND" at 2123.21,1594 h30 r315; Top Overlay "D13" at 2126.74,1488 h30 r315; Top Overlay "D12" at 2126.74,1397 h30 r315; Top Overlay "D11~" at 2105.53,1304 h30 r315; Top Overlay "D10~" at 2102,1203 h30 r315; Top Overlay "D9~" at 2119.67,1094 h30 r315; Top Overlay "D8" at 2144.41,971 h30 r315
J7: Top Overlay "NC" at 467.07,1500 h30 r315; Top Overlay "IOREF" at 458.39,1410 h30 r315; Top Overlay "3v3" at 467.07,1200 h30 r315; Top Overlay "5v" at 467.07,1100 h30 r315; Top Overlay "GND" at 467.07,1000 h30 r315; Top Overlay "GND" at 467.07,900 h30 r315; Top Overlay "Vin" at 467.07,800 h30 r315; Top Overlay "RESET" at 467.07,1300 h30 r315
J9: Top Overlay "D5~" at 2122.07,599 h30 r315; Top Overlay "D0" at 2146.81,99 h30 r315; Top Overlay "D1" at 2155,189 h30 r315; Top Overlay "D2" at 2147,296 h30 r315; Top Overlay "D3~" at 2125,409 h30 r315; Top Overlay "D6~" at 2122.07,709 h30 r315; Top Overlay "D7" at 2146.81,799 h30 r315; Top Overlay "D4" at 2145,493 h30 r315
J11: Top Overlay "A1" at 452,482 h30 r315; Top Overlay "A0" at 452,582 h30 r315; Top Overlay "A2" at 449.07,382 h30 r315; Top Overlay "A3" at 449.07,282 h30 r315; Top Overlay "A4" at 449.07,182 h30 r315; Top Overlay "A5" at 449.07,82 h30 r315